# EAGLE board Sumador (EAGLE 9.7.0)

Size 193.12 x 98.4 mm. Coordinates in mm from the lower left corner, seen from the top.
Outline: 0,0 193.12,0 193.12,98.4 0,98.4 0,0
Copper layers (1*16): Top 0.035mm / dielectric 1.5mm / Bottom 0.035mm
Design rules "default": minimum track width 6mil, minimum drill 0.35mm, track to track 6mil, track to pad 6mil, pad to pad 6mil, via to via 6mil, smd to smd 6mil, copper to edge 40mil, drill to drill 6mil, minimum pad ring 10mil, minimum via ring 8mil, stop-mask expansion 4mil, vias tented up to drill 0mil, thermal gap 10mil

## Footprints (pad centres in the part's own frame; a part is rotated, then mirrored left to right if it is on the bottom)
BATTERY-GENERIC = drill 1.118 pad 3.15 octagon: + 2.54,0; - -2.54,0
LEDRD254W60D565H860B = drill 0.981 pad 1.581: 1 -1.27,0; 2 1.27,0
RESAD1016W63L850D250B = drill 0.83 pad 1.43: 1 -5.08,0; 2 5.08,0
78B04ST = drill 0.8: 1 -3.81,-3.81; 2 -1.27,-3.81; 3 1.27,-3.81; 4 3.81,-3.81; 5 3.81,3.81; 6 1.27,3.81; 7 -1.27,3.81; 8 -3.81,3.81
DIP762W53P254L1969H508Q14B = drill 0.743 pad 1.343: 1 -3.81,7.62; 2 -3.81,5.08; 3 -3.81,2.54; 4 -3.81,0; 5 -3.81,-2.54; 6 -3.81,-5.08; 7 -3.81,-7.62; 8 3.81,-7.62; 9 3.81,-5.08; 10 3.81,-2.54; 11 3.81,0; 12 3.81,2.54; 13 3.81,5.08; 14 3.81,7.62

## Placement (x,y rotation side)
BAT2  3V  [BATTERY-GENERIC]  8.26,90.14 270 top
D1  RED  [LEDRD254W60D565H860B]  152.56,63.39 0 top
D2  RED  [LEDRD254W60D565H860B]  160.18,63.39 0 top
D3  RED  [LEDRD254W60D565H860B]  167.8,63.39 0 top
D4  RED  [LEDRD254W60D565H860B]  175.42,63.39 0 top
D5  RED  [LEDRD254W60D565H860B]  183.04,63.39 0 top
R1  200  [RESAD1016W63L850D250B]  169.07,50.69 90 top
R2  200  [RESAD1016W63L850D250B]  176.69,50.69 90 top
R3  200  [RESAD1016W63L850D250B]  161.45,50.69 90 top
R4  200  [RESAD1016W63L850D250B]  153.83,50.69 90 top
R5  200  [RESAD1016W63L850D250B]  184.31,50.01 60 top
SW1  SPST-478B04ST  [78B04ST]  56.04,67.2 0 top
SW2  SPST-478B04ST  [78B04ST]  40.8,67.2 0 top
U1  74HC08_PDIP  [DIP762W53P254L1969H508Q14B]  47.39,8.41 90 top
U2  74HC86_PDIP  [DIP762W53P254L1969H508Q14B]  67.71,8.41 90 top
U3  74HC32_PDIP  [DIP762W53P254L1969H508Q14B]  88.03,8.41 90 top
U7  74HC08_PDIP  [DIP762W53P254L1969H508Q14B]  75.09,67.2 90 top
U8  74HC86_PDIP  [DIP762W53P254L1969H508Q14B]  95.41,67.2 90 top
U9  74HC32_PDIP  [DIP762W53P254L1969H508Q14B]  115.73,67.2 90 top

## Library data of the parts
BAT2 R1-R5 SW1 SW2 U1-U3 U7-U9 = Tinkercad
D1-D5 = Tinkercad; CATEGORY: Opto-Electronic; SUB-CATEGORY: LED; VALUE: LED_RED

## Nets
BAT2+: BAT2.+ SW1.5 SW1.6 SW1.7 SW1.8 SW2.5 SW2.6 SW2.7 SW2.8 U1.14 U2.14 U3.14 U7.14 U8.14 U9.14
BAT2-: BAT2.- R1.1 R2.1 R3.1 R4.1 R5.1 U1.7 U2.7 U3.7 U7.7 U8.7 U9.7
D1_C: D1.2 R4.2
D2_C: D2.2 R3.2
D3_C: D3.2 R1.2
D4_C: D4.2 R2.2
D5_C: D5.2 R5.2
U1_2Y: U1.6 U3.4
U1_3Y: U1.8 U3.1
U1_4Y: U1.11 U3.2
U2_1A: SW2.2 U1.1 U2.1
U2_1B: SW1.2 U1.2 U2.2
U2_1Y: U1.4 U2.3 U2.5
U2_2Y: D3.1 U2.6
U2_3Y: D2.1 U2.8
U2_4A: SW2.1 U1.12 U2.12
U2_4B: SW1.1 U1.13 U2.13
U2_4Y: U1.9 U2.10 U2.11
U3_1Y: D1.1 U3.3
U3_2B: U1.3 U3.5
U3_2Y: U1.10 U2.9 U3.6
U7_1A: SW2.3 U7.1 U8.4
U7_1B: SW1.3 U7.2 U8.5
U7_1Y: U7.3 U9.2
U7_2Y: U7.6 U9.1
U7_4A: SW2.4 U7.12 U8.12
U7_4B: SW1.4 U7.13 U8.13
U7_4Y: U7.5 U7.11 U8.1
U8_1Y: D4.1 U8.3
U8_2Y: U7.4 U8.2 U8.6
U8_4Y: D5.1 U8.11
U9_1Y: U1.5 U2.4 U9.3

## Tracks (layer width: path | path; a pad name or v marks a point on that pad's centre or on a via)
BAT2+  (14 unrouted)
BAT2-  (11 unrouted)
D1_C  (1 unrouted)
D2_C  (1 unrouted)
D3_C  (1 unrouted)
D4_C  (1 unrouted)
D5_C  (1 unrouted)
U1_2Y  (1 unrouted)
U1_3Y  (1 unrouted)
U1_4Y  (1 unrouted)
U2_1A  (2 unrouted)
U2_1B  (2 unrouted)
U2_1Y  (2 unrouted)
U2_2Y  (1 unrouted)
U2_3Y  (1 unrouted)
U2_4A  (2 unrouted)
U2_4B  (2 unrouted)
U2_4Y  (2 unrouted)
U3_1Y  (1 unrouted)
U3_2B  (1 unrouted)
U3_2Y  (2 unrouted)
U7_1A  (2 unrouted)
U7_1B  (2 unrouted)
U7_1Y  (1 unrouted)
U7_2Y  (1 unrouted)
U7_4A  (2 unrouted)
U7_4B  (2 unrouted)
U7_4Y  (2 unrouted)
U8_1Y  (1 unrouted)
U8_2Y  (2 unrouted)
U8_4Y  (1 unrouted)
U9_1Y  (2 unrouted)